# EAGLE board axiom_beta_power_board_v0.34 (EAGLE 7.7.0), part 1 of 3
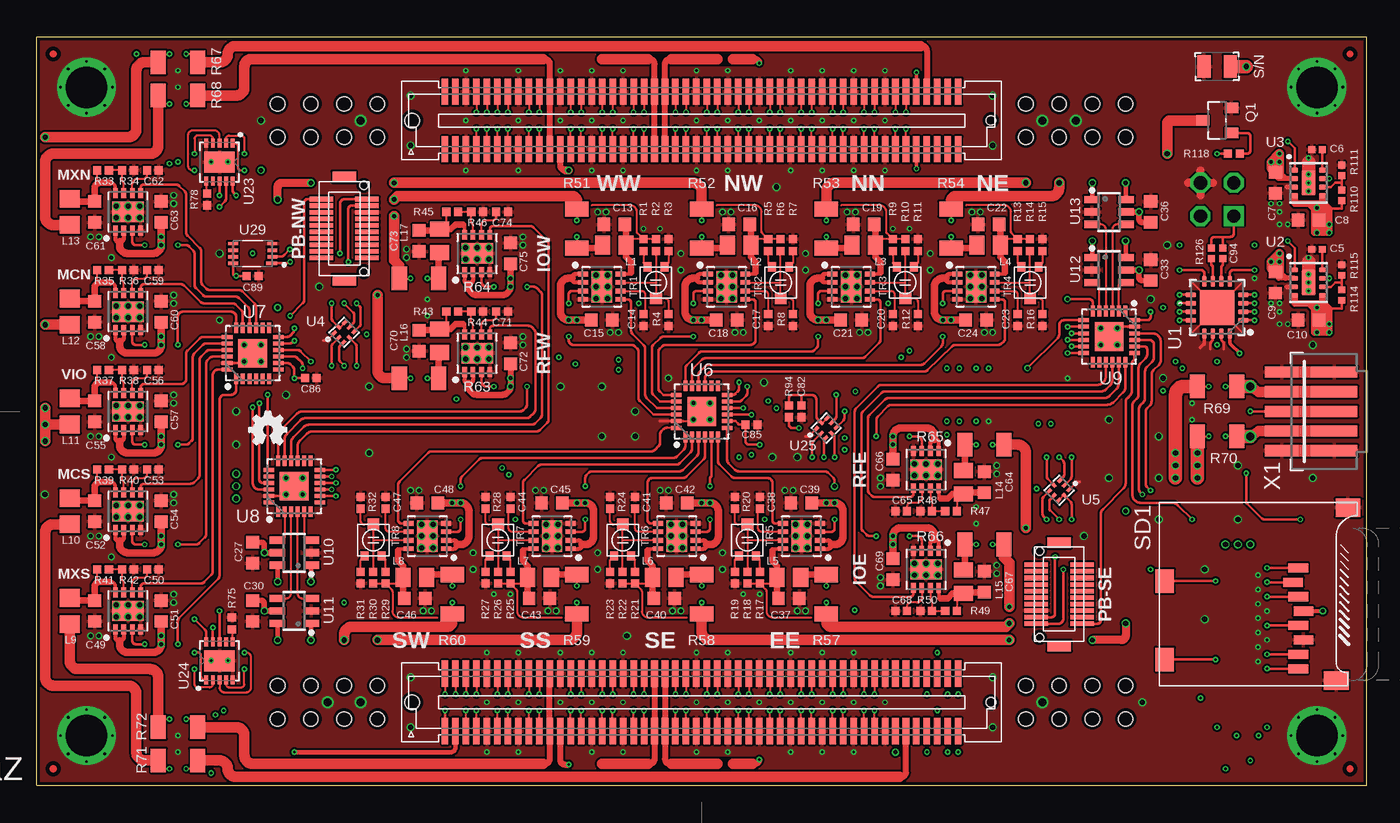
[diagram p0: board, top side]
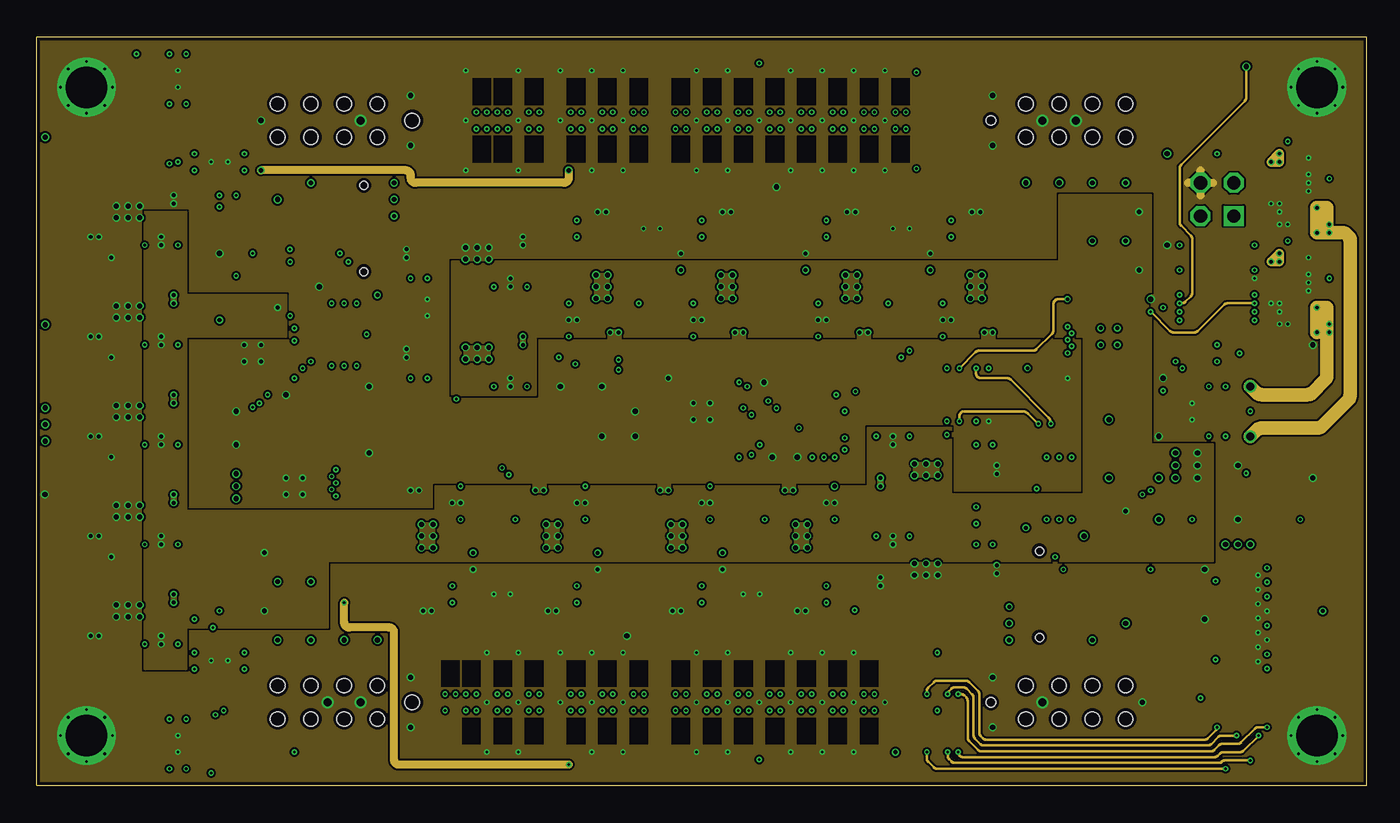
[diagram p1: board, inner layer Route2]
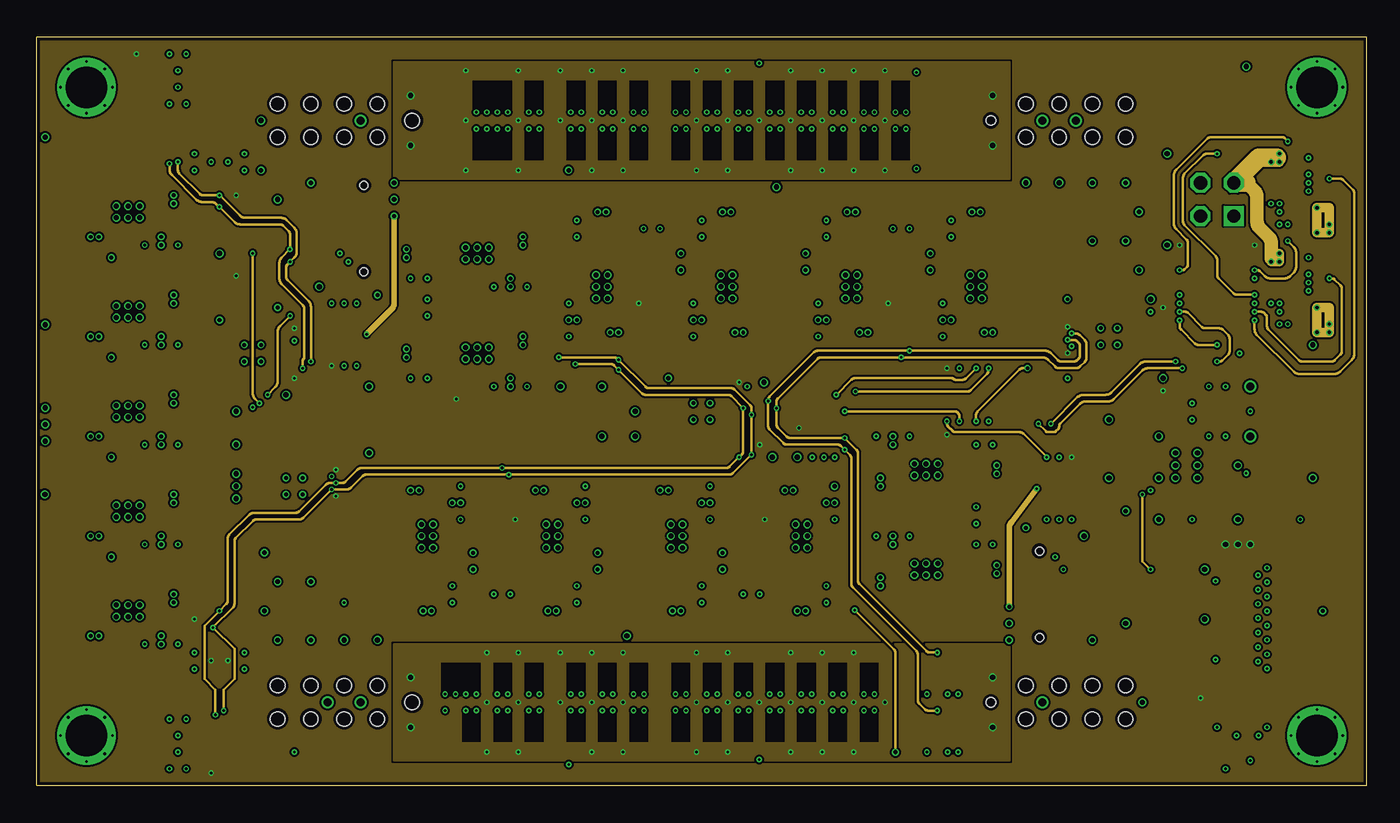
[diagram p2: board, inner layer Route15]
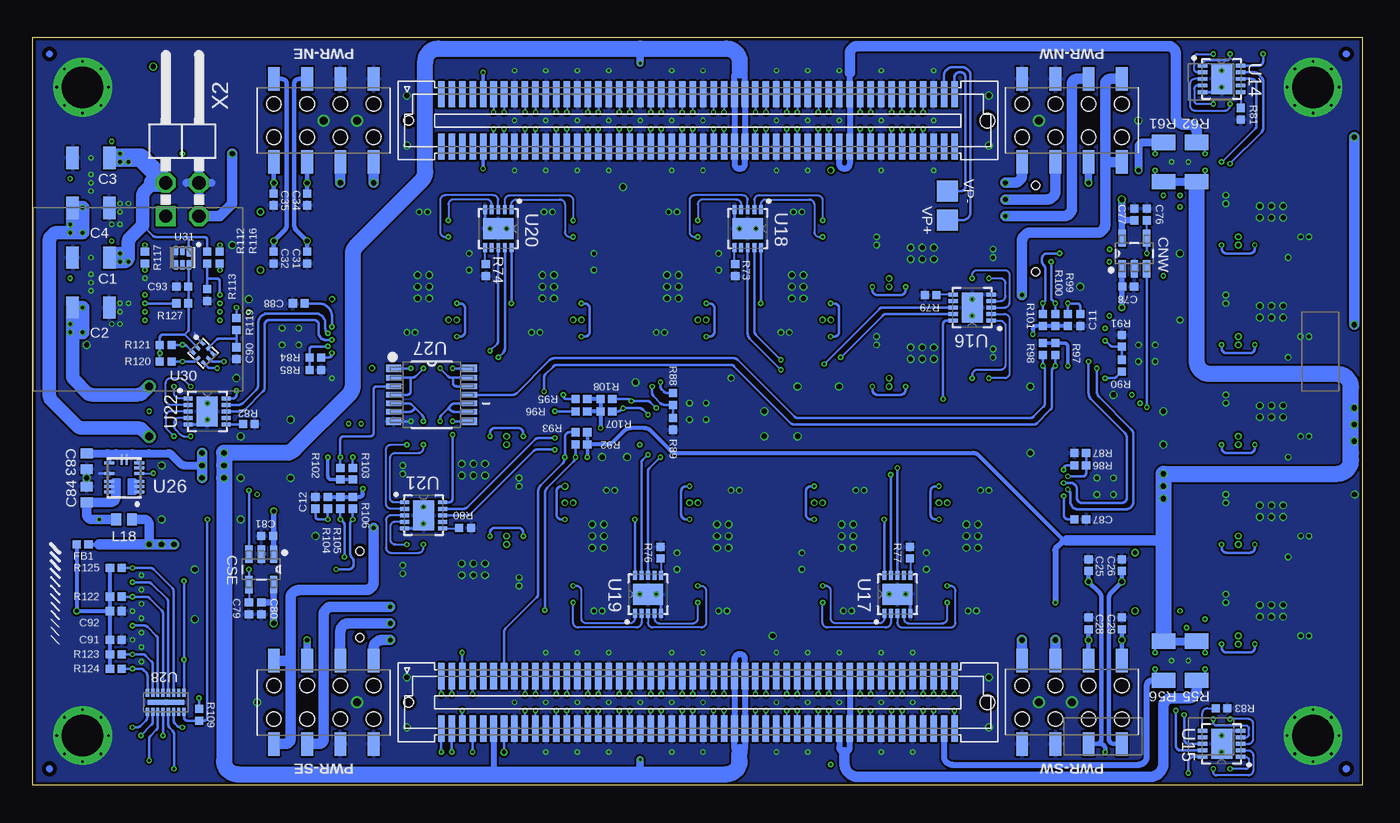
[diagram p3: board, bottom side, seen from below]

Size 101.6 x 57.15 mm. Coordinates in mm from the lower left corner, seen from the top.
Outline: 101.6,57.15 0,57.15 0,0 101.6,0 101.6,57.15
Copper layers (1*2*15*16): Top 0.035559375mm / dielectric 0.17018125mm / Route2 0.01778125mm / dielectric 47mil / Route15 0.01778125mm / dielectric 0.17018125mm / Bottom 0.035559375mm
Design rules "OSHPark-4layer-tuned *": minimum track width 5mil, minimum drill 8mil, track to track 6mil, track to pad 5mil, pad to pad 5mil, via to via 5mil, smd to smd 0mil, copper to edge 10mil, drill to drill 6mil, minimum pad ring 4mil, minimum via ring 4mil, stop-mask expansion 2mil, vias tented up to drill 25mil, thermal gap 6mil
Net classes: 1 LVDS: width 0.152 mm, drill 0.203 mm, clearance 0.152 mm
tKeepout: area 1.3,50.8 to 6.3,55.9; area 1.3,1.3 to 6.3,6.3; area 95.2,1.3 to 100.3,6.3; area 95.2,50.8 to 100.3,55.9
bKeepout: area 95.2,50.8 to 100.3,55.9; area 95.2,1.3 to 100.3,6.3; area 1.3,1.3 to 6.3,6.3; area 1.3,50.8 to 6.3,55.9
tRestrict: area 99.8,55.3 to 100.9,56.4; area 99.8,0.7 to 100.9,1.8; area 0.7,55.3 to 1.8,56.4; area 0.7,0.7 to 1.8,1.8
bRestrict: area 99.8,55.3 to 100.9,56.4; area 99.8,0.7 to 100.9,1.8; area 0.7,55.3 to 1.8,56.4; area 0.7,0.7 to 1.8,1.8

## Footprints (pad centres in the part's own frame; a part is rotated, then mirrored left to right if it is on the bottom)
µZ-SOCKET-NOHOLES-R = smd 0.5 x 2: 1 19.6,24.425; 2 19.6,20.027; 3 18.8,24.425; 4 18.8,20.027; 5 18,24.425; 6 18,20.027; 7 17.2,24.425; 8 17.2,20.027; 9 16.4,24.425; 10 16.4,20.027; 11 15.6,24.425; 12 15.6,20.027; 13 14.8,24.425; 14 14.8,20.027; 15 14,24.425; 16 14,20.027; 17 13.2,24.425; 18 13.2,20.027; 19 12.4,24.425; 20 12.4,20.027; 21 11.6,24.425; 22 11.6,20.027; 23 10.8,24.425; 24 10.8,20.027; 25 10,24.425; 26 10,20.027; 27 9.2,24.425; 28 9.2,20.027; 29 8.4,24.425; 30 8.4,20.027; 31 7.6,24.425; 32 7.6,20.027; 33 6.8,24.425; 34 6.8,20.027; 35 6,24.425; 36 6,20.027; 37 5.2,24.425; 38 5.2,20.027; 39 4.4,24.425; 40 4.4,20.027; 41 3.6,24.425; 42 3.6,20.027; 43 2.8,24.425; 44 2.8,20.027; 45 2,24.425; 46 2,20.027; 47 1.2,24.425; 48 1.2,20.027; 49 0.4,24.425; 50 0.4,20.027; 51 -0.4,24.425; 52 -0.4,20.027; 53 -1.2,24.425; 54 -1.2,20.027; 55 -2,24.425; 56 -2,20.027; 57 -2.8,24.425; 58 -2.8,20.027; 59 -3.6,24.425; 60 -3.6,20.027; 61 -4.4,24.425; 62 -4.4,20.027; 63 -5.2,24.425; 64 -5.2,20.027; 65 -6,24.425; 66 -6,20.027; 67 -6.8,24.425; 68 -6.8,20.027; 69 -7.6,24.425; 70 -7.6,20.027; 71 -8.4,24.425; 72 -8.4,20.027; 73 -9.2,24.425; 74 -9.2,20.027; 75 -10,24.425; 76 -10,20.027; 77 -10.8,24.425; 78 -10.8,20.027; 79 -11.6,24.425; 80 -11.6,20.027; 81 -12.4,24.425; 82 -12.4,20.027; 83 -13.2,24.425; 84 -13.2,20.027; 85 -14,24.425; 86 -14,20.027; 87 -14.8,24.425; 88 -14.8,20.027; 89 -15.6,24.425; 90 -15.6,20.027; 91 -16.4,24.425; 92 -16.4,20.027; 93 -17.2,24.425; 94 -17.2,20.027; 95 -18,24.425; 96 -18,20.027; 97 -18.8,24.425; 98 -18.8,20.027; 99 -19.6,24.425; 100 -19.6,20.027; 101 19.6,-20.025; 102 19.6,-24.425; 103 18.8,-20.027; 104 18.8,-24.425; 105 18,-20.027; 106 18,-24.425; 107 17.2,-20.027; 108 17.2,-24.425; 109 16.4,-20.027; 110 16.4,-24.425; 111 15.6,-20.027; 112 15.6,-24.425; 113 14.8,-20.027; 114 14.8,-24.425; 115 14,-20.027; 116 14,-24.425; 117 13.2,-20.027; 118 13.2,-24.425; 119 12.4,-20.027; 120 12.4,-24.425; 121 11.6,-20.027; 122 11.6,-24.425; 123 10.8,-20.027; 124 10.8,-24.425; 125 10,-20.027; 126 10,-24.425; 127 9.2,-20.027; 128 9.2,-24.425; 129 8.4,-20.027; 130 8.4,-24.425; 131 7.6,-20.027; 132 7.6,-24.425; 133 6.8,-20.027; 134 6.8,-24.425; 135 6,-20.027; 136 6,-24.425; 137 5.2,-20.027; 138 5.2,-24.425; 139 4.4,-20.027; 140 4.4,-24.425; 141 3.6,-20.027; 142 3.6,-24.425; 143 2.8,-20.027; 144 2.8,-24.425; 145 2,-20.027; 146 2,-24.425; 147 1.2,-20.027; 148 1.2,-24.425; 149 0.4,-20.027; 150 0.4,-24.425; 151 -0.4,-20.027; 152 -0.4,-24.425; 153 -1.2,-20.027; 154 -1.2,-24.425; 155 -2,-20.027; 156 -2,-24.425; 157 -2.8,-20.027; 158 -2.8,-24.425; 159 -3.6,-20.027; 160 -3.6,-24.425; 161 -4.4,-20.027; 162 -4.4,-24.425; 163 -5.2,-20.027; 164 -5.2,-24.425; 165 -6,-20.027; 166 -6,-24.425; 167 -6.8,-20.027; 168 -6.8,-24.425; 169 -7.6,-20.027; 170 -7.6,-24.425; 171 -8.4,-20.027; 172 -8.4,-24.425; 173 -9.2,-20.027; 174 -9.2,-24.425; 175 -10,-20.027; 176 -10,-24.425; 177 -10.8,-20.027; 178 -10.8,-24.425; 179 -11.6,-20.027; 180 -11.6,-24.425; 181 -12.4,-20.027; 182 -12.4,-24.425; 183 -13.2,-20.027; 184 -13.2,-24.425; 185 -14,-20.027; 186 -14,-24.425; 187 -14.8,-20.027; 188 -14.8,-24.425; 189 -15.6,-20.027; 190 -15.6,-24.425; 191 -16.4,-20.027; 192 -16.4,-24.425; 193 -17.2,-20.027; 194 -17.2,-24.425; 195 -18,-20.027; 196 -18,-24.425; 197 -18.8,-20.027; 198 -18.8,-24.425; 199 -19.6,-20.027; 200 -19.6,-24.425 | hole 0.725: 22.1,22.225; 22.1,-22.225 | hole 1.125: -22.1,22.225; -22.1,-22.225
1206-C = smd 0.95 x 1.7: 1 -1.4,0; 2 1.4,0
0402-C = smd 0.52 x 0.52: 1 -0.4,0; 2 0.4,0
0603-B = smd 0.95 x 1: 1 -0.8,0; 2 0.8,0
0402-B = smd 0.62 x 0.62: 1 -0.45,0; 2 0.45,0
0603-C = smd 0.75 x 0.9: 1 -0.6,0; 2 0.6,0
SOT95P280X145-5N = smd 1.321 x 0.559: 1 -1.168,0.94; 2 -1.168,0; 3 -1.168,-0.94; 4 1.168,-0.94; 5 1.168,0.94
DFN65P300X300X100-9N = smd 0.762 x 0.356: 1 -1.422,0.965; 2 -1.422,0.33; 3 -1.422,-0.33; 4 -1.422,-0.965; 5 1.422,-0.965; 6 1.422,-0.33; 7 1.422,0.33; 8 1.422,0.965 | smd 1.549 x 2.413: 9 0,0
0805-B = smd 1.15 x 1.45: 1 -0.9,0; 2 0.9,0
0805-A = smd 1.35 x 1.55: 1 -1,0; 2 1,0
DF12(XX)-20DP-0.5V = smd 1.8 x 0.35: 1 -1.75,2.25; 2 1.75,2.25; 3 -1.75,1.75; 4 1.75,1.75; 5 -1.75,1.25; 6 1.75,1.25; 7 -1.75,0.75; 8 1.75,0.75; 9 -1.75,0.25; 10 1.75,0.25; 11 -1.75,-0.25; 12 1.75,-0.25; 13 -1.75,-0.75; 14 1.75,-0.75; 15 -1.75,-1.25; 16 1.75,-1.25; 17 -1.75,-1.75; 18 1.75,-1.75; 19 -1.75,-2.25; 20 1.75,-2.25 | smd 1.8 x 0.8: M1 0,3.95; M2 0,-3.95 | hole 0.625: 1.5,-3.3; 1.5,3.3
R2X04 = smd 0.9 x 1.8: 1 -3.81,3.175; 2 -3.81,-3.175; 3 -1.27,3.175; 4 -1.27,-3.175; 5 1.27,3.175; 6 1.27,-3.175; 7 3.81,3.175; 8 3.81,-3.175 | hole 1.1: -3.81,1.27; -1.27,1.27; -1.27,-1.27; -3.81,-1.27; 1.27,1.27; 1.27,-1.27; 3.81,1.27; 3.81,-1.27
SOT23 = smd 0.8 x 1: 1 -0.95,-1.1; 2 0.95,-1.1; 3 0,1.1
1206-B = smd 1.15 x 1.8: 1 -1.5,0; 2 1.5,0
3X2MM = smd 1 x 1.75: 1 -1,0; 2 1,0
TF-MICRO-SD_PP2 = smd 0.7 x 1.5: 1 9,-10.64; 2 7.9,-10.24; 3 6.8,-10.64; 4 5.7,-11.04; 5 4.6,-10.64; 6 3.5,-11.04; 7 2.4,-10.64; 8 1.3,-10.64 | smd 1.8 x 1.4: CD1 2,-0.44; CD2 8,-0.44 | smd 1.4 x 1.9: MT1 0.4,-13.54; MT2 13.6,-14.44
TRIM-PVZ2A = smd 0.6 x 0.7: 1 -0.65,-1.2; 3 0.65,-1.2 | smd 0.9 x 0.9: 2 0,1.2
UQFN65P400X400X100-17N = smd 0.8 x 0.35: 1 -2,0.975; 2 -2,0.325; 3 -2,-0.325; 4 -2,-0.975; 9 2,-0.975; 10 2,-0.325; 11 2,0.325; 12 2,0.975 | smd 0.35 x 0.8: 5 -0.975,-2; 6 -0.325,-2; 7 0.325,-2; 8 0.975,-2; 13 0.975,2; 14 0.325,2; 15 -0.325,2; 16 -0.975,2 | smd 2.7 x 2.7: EP 0,0
SIL0008D-GM = smd 0.5 x 0.4: 1 -1.05,0.975; 2 -1.05,0.325; 3 -1.05,-0.325; 4 -1.05,-0.975; 5 1.05,-0.975; 6 1.05,-0.325; 7 1.05,0.325; 8 1.05,0.975 | smd 1.1 x 1.9: EPAD 0,0
PCA9570GMH = smd 0.45 x 0.25: 1 -0.6,0.5; 2 -0.6,0; 3 -0.6,-0.5; 5 0.6,-0.5; 6 0.6,0; 7 0.6,0.5 | smd 0.25 x 0.45: 4 0,-0.6; 8 0,0.6
QFN50P400X400X80-25N = smd 0.813 x 0.305: 1 -1.95,1.25; 2 -1.95,0.75; 3 -1.95,0.25; 4 -1.95,-0.25; 5 -1.95,-0.75; 6 -1.95,-1.25; 13 1.95,-1.25; 14 1.95,-0.75; 15 1.95,-0.25; 16 1.95,0.25; 17 1.95,0.75; 18 1.95,1.25 | smd 0.305 x 0.813: 7 -1.25,-1.95; 8 -0.75,-1.95; 9 -0.25,-1.95; 10 0.25,-1.95; 11 0.75,-1.95; 12 1.25,-1.95; 19 1.25,1.95; 20 0.75,1.95; 21 0.25,1.95; 22 -0.25,1.95; 23 -0.75,1.95; 24 -1.25,1.95 | smd 2.2 x 2.2: 25 0,0
SOT23-6 = smd 0.55 x 1.2: 1 -0.95,-1.3; 2 0,-1.3; 3 0.95,-1.3; 4 0.95,1.3; 5 0,1.3; 6 -0.95,1.3
DFN3X3_10LEAD = smd 0.7 x 0.3: 1 -1.45,1; 2 -1.45,0.5; 3 -1.45,0; 4 -1.45,-0.5; 5 -1.45,-1; 6 1.45,-1; 7 1.45,-0.5; 8 1.45,0; 9 1.45,0.5; 10 1.45,1 | smd 1.6 x 2.3: EPAD 0,0
MLPQ-13 = smd 0.8 x 0.2: 1 -1.15,1.065; 2 -1.15,0.665; 3 -1.15,0.265; 4 -1.15,-0.355; 5 -1.15,-0.755; 6 -1.15,-1.155; 9 1.15,-1.155; 10 1.15,-0.355; 11 1.15,0.265; 12 1.15,0.665; 13 1.15,1.065 | smd 0.2 x 0.8: 7 -0.2,-1.4; 8 0.2,-1.4
SOP65P640X120-14N = smd 0.6 x 1.15: 1 -2.025,-2.9; 7 2.025,-2.9; 8 2.025,2.9; 14 -2.025,2.9 | smd 0.4 x 1.15: 2 -1.3,-2.9; 3 -0.65,-2.9; 4 0,-2.9; 5 0.65,-2.9; 6 1.3,-2.9; 9 1.3,2.9; 10 0.65,2.9; 11 0,2.9; 12 -0.65,2.9; 13 -1.3,2.9
SON40P135X330X55-17N = smd 0.61 x 0.254: 1 -0.737,1.397; 2 -0.737,0.991; 3 -0.737,0.61; 4 -0.737,0.203; 5 -0.737,-0.203; 6 -0.737,-0.61; 7 -0.737,-0.991; 8 -0.737,-1.397; 9 0.737,-1.397; 10 0.737,-0.991; 11 0.737,-0.61; 12 0.737,-0.203; 13 0.737,0.203; 14 0.737,0.61; 15 0.737,0.991; 16 0.737,1.397 | smd 0.406 x 2.794: 17 0,0
SOT996-2/3 = smd 0.25 x 0.85: 1 -0.75,-1.45 | smd 0.25 x 0.75: 2 -0.25,-1.5; 3 0.25,-1.5; 4 0.75,-1.5; 5 0.75,1.5; 6 0.25,1.5; 7 -0.25,1.5; 8 -0.75,1.5
DFN150X150X50-6N = smd 0.83 x 0.35: 1 -0.49,0.5 | smd 0.73 x 0.35: 2 -0.54,0; 3 -0.54,-0.5; 4 0.54,-0.5; 5 0.54,0; 6 0.54,0.5
TP16SQ = smd 1.6 x 1.6: TP 0,0
PICO-SPOX-5 = smd 0.85 x 2.55: 1 -3,-6.5; 2 -1.5,-6.5; 3 0,-6.5; 4 1.5,-6.5; 5 3,-6.5 | smd 0.85 x 3.55: 1A -3,-2.5; 2A -1.5,-2.5; 3A 0,-2.5; 4A 1.5,-2.5; 5A 3,-2.5
2X02/90 = drill 1.016 square: 1 -1.27,-6.35 | drill 1.016 octagon: 2 -1.27,-3.81; 3 1.27,-6.35; 4 1.27,-3.81
µZ-CONONLY = smd 0.5 x 2: 1 19.6,-24.226; 2 19.6,-20.226; 3 18.8,-24.226; 4 18.8,-20.226; 5 18,-24.226; 6 18,-20.226; 7 17.2,-24.226; 8 17.2,-20.226; 9 16.4,-24.226; 10 16.4,-20.226; 11 15.6,-24.226; 12 15.6,-20.226; 13 14.8,-24.226; 14 14.8,-20.226; 15 14,-24.226; 16 14,-20.226; 17 13.2,-24.226; 18 13.2,-20.226; 19 12.4,-24.226; 20 12.4,-20.226; 21 11.6,-24.226; 22 11.6,-20.226; 23 10.8,-24.226; 24 10.8,-20.226; 25 10,-24.226; 26 10,-20.226; 27 9.2,-24.226; 28 9.2,-20.226; 29 8.4,-24.226; 30 8.4,-20.226; 31 7.6,-24.226; 32 7.6,-20.226; 33 6.8,-24.226; 34 6.8,-20.226; 35 6,-24.226; 36 6,-20.226; 37 5.2,-24.226; 38 5.2,-20.226; 39 4.4,-24.226; 40 4.4,-20.226; 41 3.6,-24.226; 42 3.6,-20.226; 43 2.8,-24.226; 44 2.8,-20.226; 45 2,-24.226; 46 2,-20.226; 47 1.2,-24.226; 48 1.2,-20.226; 49 0.4,-24.226; 50 0.4,-20.226; 51 -0.4,-24.226; 52 -0.4,-20.226; 53 -1.2,-24.226; 54 -1.2,-20.226; 55 -2,-24.226; 56 -2,-20.226; 57 -2.8,-24.226; 58 -2.8,-20.226; 59 -3.6,-24.226; 60 -3.6,-20.226; 61 -4.4,-24.226; 62 -4.4,-20.226; 63 -5.2,-24.226; 64 -5.2,-20.226; 65 -6,-24.226; 66 -6,-20.226; 67 -6.8,-24.226; 68 -6.8,-20.226; 69 -7.6,-24.226; 70 -7.6,-20.226; 71 -8.4,-24.226; 72 -8.4,-20.226; 73 -9.2,-24.226; 74 -9.2,-20.226; 75 -10,-24.226; 76 -10,-20.226; 77 -10.8,-24.226; 78 -10.8,-20.226; 79 -11.6,-24.226; 80 -11.6,-20.226; 81 -12.4,-24.226; 82 -12.4,-20.226; 83 -13.2,-24.226; 84 -13.2,-20.226; 85 -14,-24.226; 86 -14,-20.226; 87 -14.8,-24.226; 88 -14.8,-20.226; 89 -15.6,-24.226; 90 -15.6,-20.226; 91 -16.4,-24.226; 92 -16.4,-20.226; 93 -17.2,-24.226; 94 -17.2,-20.226; 95 -18,-24.226; 96 -18,-20.226; 97 -18.8,-24.226; 98 -18.8,-20.226; 99 -19.6,-24.226; 100 -19.6,-20.226; 101 19.6,20.226; 102 19.6,24.226; 103 18.8,20.226; 104 18.8,24.226; 105 18,20.226; 106 18,24.226; 107 17.2,20.226; 108 17.2,24.226; 109 16.4,20.226; 110 16.4,24.226; 111 15.6,20.226; 112 15.6,24.226; 113 14.8,20.226; 114 14.8,24.226; 115 14,20.226; 116 14,24.226; 117 13.2,20.226; 118 13.2,24.226; 119 12.4,20.226; 120 12.4,24.226; 121 11.6,20.226; 122 11.6,24.226; 123 10.8,20.226; 124 10.8,24.226; 125 10,20.226; 126 10,24.226; 127 9.2,20.226; 128 9.2,24.226; 129 8.4,20.226; 130 8.4,24.226; 131 7.6,20.226; 132 7.6,24.226; 133 6.8,20.226; 134 6.8,24.226; 135 6,20.226; 136 6,24.226; 137 5.2,20.226; 138 5.2,24.226; 139 4.4,20.226; 140 4.4,24.226; 141 3.6,20.226; 142 3.6,24.226; 143 2.8,20.226; 144 2.8,24.226; 145 2,20.226; 146 2,24.226; 147 1.2,20.226; 148 1.2,24.226; 149 0.4,20.226; 150 0.4,24.226; 151 -0.4,20.226; 152 -0.4,24.226; 153 -1.2,20.226; 154 -1.2,24.226; 155 -2,20.226; 156 -2,24.226; 157 -2.8,20.226; 158 -2.8,24.226; 159 -3.6,20.226; 160 -3.6,24.226; 161 -4.4,20.226; 162 -4.4,24.226; 163 -5.2,20.226; 164 -5.2,24.226; 165 -6,20.226; 166 -6,24.226; 167 -6.8,20.226; 168 -6.8,24.226; 169 -7.6,20.226; 170 -7.6,24.226; 171 -8.4,20.226; 172 -8.4,24.226; 173 -9.2,20.226; 174 -9.2,24.226; 175 -10,20.226; 176 -10,24.226; 177 -10.8,20.226; 178 -10.8,24.226; 179 -11.6,20.226; 180 -11.6,24.226; 181 -12.4,20.226; 182 -12.4,24.226; 183 -13.2,20.226; 184 -13.2,24.226; 185 -14,20.226; 186 -14,24.226; 187 -14.8,20.226; 188 -14.8,24.226; 189 -15.6,20.226; 190 -15.6,24.226; 191 -16.4,20.226; 192 -16.4,24.226; 193 -17.2,20.226; 194 -17.2,24.226; 195 -18,20.226; 196 -18,24.226; 197 -18.8,20.226; 198 -18.8,24.226; 199 -19.6,20.226; 200 -19.6,24.226 | hole 1.125: -22.1,-22.225; -22.1,22.225 | hole 0.725: 22.1,-22.225; 22.1,22.225

## Placement (x,y rotation side)
BETA  µZ-FCI-SOCKET-NOHOLES-R  [µZ-SOCKET-NOHOLES-R]  50.8,28.57 0 top
C1  10u  [1206-C]  97.16,40.32 180 bottom
C2  10u  [1206-C]  97.16,36.51 0 bottom
C3  10u  [1206-C]  97.16,47.94 180 bottom
C4  10u  [1206-C]  97.16,44.13 0 bottom
C5  1n  [0402-C]  97.79,40.96 180 top
C6  1n  [0402-C]  97.79,48.58 180 top
C7  10u  [0603-B]  94.61,46.04 270 top
C8  10u  [0603-B]  97.16,43.18 180 top
C9  10u  [0603-B]  94.61,38.42 270 top
C10  10u  [0603-B]  97.16,35.56 180 top
C11  10n  [0402-B]  21.59,35.56 270 bottom
C12  10n  [0402-B]  80.01,21.59 90 bottom
C13  4u7  [0603-B]  44.13,42.86 180 top
C14  DNP  [0402-B]  46.35,35.56 270 top
C15  10u  [0603-B]  43.18,35.56 0 top
C16  4u7  [0603-B]  53.66,42.86 180 top
C17  DNP  [0402-B]  55.88,35.56 270 top
C18  10u  [0603-B]  52.7,35.56 0 top
C19  4u7  [0603-B]  63.18,42.86 180 top
C20  DNP  [0402-B]  65.41,35.56 270 top
C21  10u  [0603-B]  62.23,35.56 0 top
C22  4u7  [0603-B]  72.71,42.86 180 top
C23  DNP  [0402-B]  74.93,35.56 270 top
C24  10u  [0603-B]  71.75,35.56 0 top
C25  1u  [0402-B]  20.95,16.83 90 bottom
C26  1u  [0402-B]  18.41,16.83 90 bottom
C27  4u7  [0603-B]  16.51,17.78 270 top
C28  1u  [0402-B]  20.95,12.38 90 bottom
C29  1u  [0402-B]  18.41,12.38 90 bottom
C30  4u7  [0603-B]  16.51,13.33 270 top
C31  1u  [0402-B]  80.64,40.32 270 bottom
C32  1u  [0402-B]  83.19,40.32 270 bottom
C33  4u7  [0603-B]  85.09,39.37 90 top
C34  1u  [0402-B]  80.64,44.77 270 bottom
C35  1u  [0402-B]  83.19,44.77 270 bottom
C36  4u7  [0603-B]  85.09,43.81 90 top
C37  4u7  [0603-B]  57.47,14.29 0 top
C38  DNP  [0402-B]  55.24,21.59 90 top
C39  10u  [0603-B]  58.42,21.59 180 top
C40  4u7  [0603-B]  47.94,14.29 0 top
C41  DNP  [0402-B]  45.72,21.59 90 top
C42  10u  [0603-B]  48.89,21.59 180 top
C43  4u7  [0603-B]  38.42,14.29 0 top
C44  DNP  [0402-B]  36.19,21.59 90 top
C45  10u  [0603-B]  39.37,21.59 180 top
C46  4u7  [0603-B]  28.89,14.29 0 top
C47  DNP  [0402-B]  26.67,21.59 90 top
C48  10u  [0603-B]  29.84,21.59 180 top
C49  4u7  [0603-B]  4.45,13.33 270 top
C50  DNP  [0402-B]  8.89,16.51 0 top
C51  10u  [0603-B]  9.52,13.33 90 top
C52  4u7  [0603-B]  4.45,20.95 270 top
C53  DNP  [0402-B]  8.89,24.13 0 top
C54  10u  [0603-B]  9.52,20.95 90 top
C55  4u7  [0603-B]  4.45,28.57 270 top
C56  DNP  [0402-B]  8.89,31.75 0 top
C57  10u  [0603-B]  9.52,28.57 90 top
C58  4u7  [0603-B]  4.45,36.2 270 top
C59  DNP  [0402-B]  8.89,39.37 0 top
C60  10u  [0603-B]  9.52,36.2 90 top
C61  4u7  [0603-B]  4.45,43.81 270 top
C62  DNP  [0402-B]  8.89,46.99 0 top
C63  10u  [0603-B]  9.52,43.81 90 top
C64  4u7  [0603-B]  72.39,23.18 90 top
C65  DNP  [0402-B]  66.04,20.95 180 top
C66  10u  [0603-B]  65.41,24.13 270 top
C67  4u7  [0603-B]  72.39,15.56 90 top
C68  DNP  [0402-B]  66.04,13.33 180 top
C69  10u  [0603-B]  65.41,16.51 270 top
C70  4u7  [0603-B]  29.21,33.97 270 top
C71  DNP  [0402-B]  35.56,36.2 0 top
C72  10u  [0603-B]  36.19,33.02 90 top
C73  4u7  [0603-B]  29.21,41.59 270 top
C74  DNP  [0402-B]  35.56,43.81 0 top
C75  10u  [0603-B]  36.19,40.64 90 top
C76  10n  [0402-B]  16.51,43.62 90 bottom
C77  1u  [0402-B]  17.46,43.62 90 bottom
C78  1u  [0402-B]  17.93,38.1 0 bottom
C79  10n  [0402-B]  85.09,13.53 270 bottom
C80  1u  [0402-B]  84.14,13.53 270 bottom
C81  1u  [0402-B]  83.69,19.05 180 bottom
C82  10n  [0402-B]  58.42,28.57 270 top
C83  10u  [0603-C]  97.47,24.77 270 bottom
C84  10u  [0603-C]  97.47,22.23 90 bottom
C85  100n  [0402-B]  54.61,27.56 0 top
C86  100n  [0402-B]  20.95,31.11 0 top
C87  100n  [0402-B]  21.59,20.32 0 bottom
C88  100n  [0402-B]  81.28,36.83 180 bottom
C89  100n  [0402-B]  16.51,38.93 0 top
C90  10n  [0402-B]  86.04,33.02 270 bottom
C91  1u  [0402-B]  95.25,11.12 0 bottom
C92  100n  [0402-B]  95.25,13.32 0 bottom
C93  4u7  [0402-B]  90.17,38.1 180 bottom
C94  100n  [0402-C]  90.61,40.64 270 top
CNW  SPX3819M5-L  [SOT95P280X145-5N]  17.46,40.64 90 bottom
CSE  SPX3819M5-L  [SOT95P280X145-5N]  84.14,16.51 270 bottom
EE  MCP1727-ADJE/MF  [DFN65P300X300X100-9N]  58.42,19.05 180 top
FB1  [0402-B]  97.79,18.41 180 bottom
IOE  MCP1727-ADJE/MF  [DFN65P300X300X100-9N]  67.94,16.51 270 top
IOW  MCP1727-ADJE/MF  [DFN65P300X300X100-9N]  33.66,40.64 90 top
L1  [0805-B]  44.13,41.27 180 top
L2  [0805-B]  53.66,41.27 180 top
L3  [0805-B]  63.18,41.27 180 top
L4  [0805-B]  72.71,41.27 180 top
L5  [0805-B]  57.47,15.88 0 top
L6  [0805-B]  47.94,15.88 0 top
L7  [0805-B]  38.42,15.88 0 top
L8  [0805-B]  28.89,15.88 0 top
L9  [0805-A]  2.54,13.33 270 top
L10  [0805-A]  2.54,20.95 270 top
L11  [0805-A]  2.54,28.57 270 top
L12  [0805-A]  2.54,36.2 270 top
L13  [0805-A]  2.54,43.81 270 top
L14  [0805-B]  70.8,23.18 90 top
L15  [0805-B]  70.8,15.56 90 top
L16  [0805-B]  30.8,33.97 270 top
L17  [0805-B]  30.8,41.59 270 top
L18  [0603-C]  94.61,20.32 0 bottom
LOGO1  OSHW_LOGO_FILLX0100-NT  [OSHW_FILLX100_NOTEXT]  16.26,26.04 0 top
MCN  MCP1727-ADJE/MF  [DFN65P300X300X100-9N]  6.98,36.2 90 top
MCS  MCP1727-ADJE/MF  [DFN65P300X300X100-9N]  6.98,20.95 90 top
MXN  MCP1727-ADJE/MF  [DFN65P300X300X100-9N]  6.98,43.81 90 top
MXS  MCP1727-ADJE/MF  [DFN65P300X300X100-9N]  6.98,13.33 90 top
NE  MCP1727-ADJE/MF  [DFN65P300X300X100-9N]  71.75,38.1 0 top
NN  MCP1727-ADJE/MF  [DFN65P300X300X100-9N]  62.23,38.1 0 top
NW  MCP1727-ADJE/MF  [DFN65P300X300X100-9N]  52.7,38.1 0 top
PB-NW  DF12(XX)-20DP-0.5V  [DF12(XX)-20DP-0.5V]  23.49,42.55 0 top
PB-SE  DF12(XX)-20DP-0.5V  [DF12(XX)-20DP-0.5V]  78.1,14.6 180 top
PWR-NE  PINRC-2X04  [R2X04]  79.38,50.8 180 bottom
PWR-NW  PINRC-2X04  [R2X04]  22.22,50.8 0 bottom
PWR-SE  PINRC-2X04  [R2X04]  79.38,6.35 180 bottom
PWR-SW  PINRC-2X04  [R2X04]  22.22,6.35 0 bottom
Q1  NX3008NBK  [SOT23]  90.17,50.8 90 top
R1  RA  [0402-B]  46.35,41.27 90 top
R2  RB  [0402-B]  47.31,41.27 270 top
R3  RC  [0402-B]  48.26,41.27 90 top
R4  RD  [0402-B]  48.26,35.56 270 top
R5  RA  [0402-B]  55.88,41.27 90 top
R6  RB  [0402-B]  56.83,41.27 270 top
R7  RC  [0402-B]  57.78,41.27 90 top
R8  RD  [0402-B]  57.78,35.56 270 top
R9  RA  [0402-B]  65.41,41.27 90 top
R10  RB  [0402-B]  66.36,41.27 270 top
R11  RC  [0402-B]  67.31,41.27 90 top
R12  RD  [0402-B]  67.31,35.56 270 top
R13  RA  [0402-B]  74.93,41.27 90 top
R14  RB  [0402-B]  75.88,41.27 270 top
R15  RC  [0402-B]  76.83,41.27 90 top
R16  RD  [0402-B]  76.83,35.56 270 top
R17  RA  [0402-B]  55.24,15.88 270 top
R18  RB  [0402-B]  54.29,15.88 90 top
R19  RC  [0402-B]  53.34,15.88 270 top
R20  RD  [0402-B]  53.34,21.59 90 top
R21  RA  [0402-B]  45.72,15.88 270 top
R22  RB  [0402-B]  44.77,15.88 90 top
R23  RC  [0402-B]  43.81,15.88 270 top
R24  RD  [0402-B]  43.81,21.59 90 top
R25  RA  [0402-B]  36.19,15.88 270 top
R26  RB  [0402-B]  35.24,15.88 90 top
R27  RC  [0402-B]  34.29,15.88 270 top
R28  RD  [0402-B]  34.29,21.59 90 top
R29  RA  [0402-B]  26.67,15.88 270 top
R30  RB  [0402-B]  25.72,15.88 90 top
R31  RC  [0402-B]  24.76,15.88 270 top
R32  RD  [0402-B]  24.76,21.59 90 top
R33  RD  [0402-B]  5.08,46.99 0 top
R34  RC  [0402-B]  6.98,46.99 0 top
R35  RD  [0402-B]  5.08,39.37 0 top
R36  RC  [0402-B]  6.98,39.37 0 top
R37  102k  [0402-B]  5.08,31.75 0 top
R38  20k  [0402-B]  6.98,31.75 0 top
R39  RD  [0402-B]  5.08,24.13 0 top
R40  RC  [0402-B]  6.98,24.13 0 top
R41  RD  [0402-B]  5.08,16.51 0 top
R42  RC  [0402-B]  6.98,16.51 0 top
R43  RD  [0402-B]  31.75,36.2 0 top
R44  RC  [0402-B]  33.66,36.2 0 top
R45  RD  [0402-B]  31.75,43.81 0 top
R46  RC  [0402-B]  33.66,43.81 0 top
R47  RD  [0402-B]  69.85,20.95 180 top
R48  RC  [0402-B]  67.94,20.95 180 top
R49  RD  [0402-B]  69.85,13.33 180 top
R50  RC  [0402-B]  67.94,13.33 180 top
R51  [1206-B]  41.27,42.55 90 top
R52  [1206-B]  50.8,42.55 90 top
R53  [1206-B]  60.32,42.55 90 top
R54  [1206-B]  69.85,42.55 90 top
R55  [1206-B]  12.7,9.52 270 bottom
R56  [1206-B]  15.24,9.52 270 bottom
R57  [1206-B]  60.32,14.6 270 top
R58  [1206-B]  50.8,14.6 270 top
R59  [1206-B]  41.27,14.6 270 top
R60  [1206-B]  31.75,14.6 270 top
R61  [1206-B]  15.24,47.62 90 bottom
R62  [1206-B]  12.7,47.62 90 bottom
R63  [1206-B]  29.21,31.11 180 top
R64  [1206-B]  29.21,38.73 180 top
R65  [1206-B]  72.39,26.04 0 top
R66  [1206-B]  72.39,18.41 0 top
R67  [1206-B]  10.79,55.25 0 top
R68  [1206-B]  10.79,52.7 0 top
R69  [1206-B]  90.17,30.48 180 top
R70  [1206-B]  90.17,26.67 180 top
R71  [1206-B]  10.79,1.9 0 top
R72  [1206-B]  10.79,4.45 0 top
R73  750R  [0402-B]  47.94,39.37 270 bottom
R74  1k27  [0402-B]  66.99,39.37 270 bottom
R75  430R  [0402-B]  14.92,12.38 90 top
R76  0R  [0402-B]  53.66,17.78 90 bottom
R77  100R  [0402-B]  34.61,17.78 90 bottom
R78  560R  [0402-B]  13.02,44.77 270 top
R79  5k6  [0402-B]  33.02,37.47 180 bottom
R80  9k1  [0402-B]  68.58,19.68 0 bottom
R81  2k0  [0402-B]  9.33,51.31 270 bottom
R82  1k6  [0402-B]  85.09,27.62 0 bottom
R83  2k7  [0402-B]  10.79,5.91 0 bottom
R84  22k  [0402-B]  80.01,32.7 180 bottom
R85  10k  [0402-B]  80.01,31.75 0 bottom
R86  13k  [0402-B]  21.59,24.45 0 bottom
R87  10k  [0402-B]  21.59,25.4 180 bottom
R88  13k  [0402-B]  52.7,29.53 270 bottom
R89  3k  [0402-B]  52.7,27.62 270 bottom
R90  15k  [0402-B]  18.41,32.07 90 bottom
R91  1k  [0402-B]  18.41,33.97 90 bottom
R92  4k7  [0402-B]  59.69,26.04 180 bottom
R93  4k7  [0402-B]  59.69,26.99 180 bottom
R94  200k  [0402-B]  57.47,28.57 90 top
R95  4k7  [0402-B]  59.69,29.53 180 bottom
R96  4k7  [0402-B]  59.69,28.57 180 bottom
R97  4k7  [0402-B]  23.49,33.34 270 bottom
R98  4k7  [0402-B]  24.45,33.34 270 bottom
R99  200k  [0402-B]  22.54,35.56 90 bottom
R100  4k7  [0402-B]  23.49,35.56 90 bottom
R101  4k7  [0402-B]  24.45,35.56 90 bottom
R102  4k7  [0402-B]  78.1,23.81 90 bottom
R103  4k7  [0402-B]  77.15,23.81 90 bottom
R104  200k  [0402-B]  79.06,21.59 270 bottom
R105  4k7  [0402-B]  78.1,21.59 270 bottom
R106  4k7  [0402-B]  77.15,21.59 270 bottom
R107  4k7  [0402-B]  57.78,28.57 0 bottom
R108  4k7  [0402-B]  57.78,29.53 0 bottom
R109  10k  [0402-B]  88.9,5.4 270 bottom
R110  523k  [0402-C]  99.69,45.09 90 top
R111  100k  [0402-C]  99.69,46.99 90 top
R112  180k  [0402-B]  88.27,40.32 270 bottom
R113  20k  [0402-B]  88.27,37.47 270 bottom
R114  536k  [0402-C]  99.69,37.47 90 top
R115  100k  [0402-C]  99.69,39.37 90 top
R116  100k  [0402-B]  87.31,40.32 270 bottom
R117  100k  [0402-B]  93.03,40.32 270 bottom
R118  100k  [0402-B]  91.44,48.26 180 top
R119  200k  [0402-B]  86.04,35.24 270 bottom
R120  4k7  [0402-B]  91.44,32.38 0 bottom
R121  4k7  [0402-B]  91.44,33.66 0 bottom
R122  50k  [0402-B]  95.25,14.42 0 bottom
R123  50k  [0402-B]  95.25,10.02 0 bottom
R124  50k  [0402-B]  95.25,8.92 0 bottom
R125  50k  [0402-B]  95.25,16.62 0 bottom
R126  100k  [0402-C]  89.73,40.64 90 top
R127  10k  [0402-B]  90.17,36.83 180 bottom
RFE  MCP1727-ADJE/MF  [DFN65P300X300X100-9N]  67.94,24.13 270 top
RFW  MCP1727-ADJE/MF  [DFN65P300X300X100-9N]  33.66,33.02 90 top
S/N  91658  [3X2MM]  90.17,54.93 0 top
SD1  MICRO-SD-2CD  [TF-MICRO-SD_PP2]  85.72,7.62 90 top
SE  MCP1727-ADJE/MF  [DFN65P300X300X100-9N]  48.89,19.05 180 top
SS  MCP1727-ADJE/MF  [DFN65P300X300X100-9N]  39.37,19.05 180 top
SW  MCP1727-ADJE/MF  [DFN65P300X300X100-9N]  29.84,19.05 180 top
TR1  PVZ2A  [TRIM-PVZ2A]  47.31,38.42 180 top
TR2  PVZ2A  [TRIM-PVZ2A]  56.83,38.42 180 top
TR3  PVZ2A  [TRIM-PVZ2A]  66.36,38.42 180 top
TR4  PVZ2A  [TRIM-PVZ2A]  75.88,38.42 180 top
TR5  PVZ2A  [TRIM-PVZ2A]  54.29,18.73 0 top
TR6  PVZ2A  [TRIM-PVZ2A]  44.77,18.73 0 top
TR7  PVZ2A  [TRIM-PVZ2A]  35.24,18.73 0 top
TR8  PVZ2A  [TRIM-PVZ2A]  25.72,18.73 0 top
U1  PIC16F15325-JQ  [UQFN65P400X400X100-17N]  90.17,36.51 180 top
U2  TPS82130SIL-GM  [SIL0008D-GM]  97.16,38.42 0 top
U3  TPS82130SIL-GM  [SIL0008D-GM]  97.16,46.04 0 top
U4  PCA9306GM  [PCA9570GMH]  23.49,34.61 45 top
U5  PCA9306GM  [PCA9570GMH]  78.1,22.54 225 top
U6  MCP23018-E/MJ  [QFN50P400X400X80-25N]  50.8,28.57 90 top
U7  MCP23018-E/MJ  [QFN50P400X400X80-25N]  16.51,33.02 90 top
U8  MCP23018-E/MJ  [QFN50P400X400X80-25N]  19.68,22.86 90 top
U9  MCP23018-E/MJ  [QFN50P400X400X80-25N]  81.91,34.29 270 top
U10  AP7312-3333W6-7  [SOT23-6]  19.68,17.78 90 top
U11  AP7312-3333W6-7  [SOT23-6]  19.68,13.33 90 top
U12  AP7312-3333W6-7  [SOT23-6]  81.91,39.37 270 top
U13  AP7312-3333W6-7  [SOT23-6]  81.91,43.81 270 top
U14  PAC1720  [DFN3X3_10LEAD]  10.79,53.97 0 bottom
U15  PAC1720  [DFN3X3_10LEAD]  10.79,3.18 180 bottom
U16  PAC1720  [DFN3X3_10LEAD]  29.84,36.51 180 bottom
U17  PAC1720  [DFN3X3_10LEAD]  35.56,14.6 90 bottom
U18  PAC1720  [DFN3X3_10LEAD]  46.99,42.55 270 bottom
U19  PAC1720  [DFN3X3_10LEAD]  54.61,14.6 90 bottom
U20  PAC1720  [DFN3X3_10LEAD]  66.04,42.55 270 bottom
U21  PAC1720  [DFN3X3_10LEAD]  71.75,20.64 0 bottom
U22  PAC1720  [DFN3X3_10LEAD]  88.27,28.57 0 bottom
U23  PAC1720  [DFN3X3_10LEAD]  13.97,47.62 270 top
U24  PAC1720  [DFN3X3_10LEAD]  13.97,9.52 90 top
U25  PCA9306GM  [PCA9570GMH]  60.32,27.3 45 top
U26  SC202A  [MLPQ-13]  94.61,23.49 180 bottom
U27  TS3A4751  [SOP65P640X120-14N]  71.12,29.84 270 bottom
U28  IP4251CZ16-8-TTL  [SON40P135X330X55-17N]  91.44,6.35 270 bottom
U29  LM75BGD  [SOT996-2/3]  16.51,40.64 90 top
U30  PCA9306GM  [PCA9570GMH]  88.58,33.02 315 bottom
U31  NCP715  [DFN150X150X50-6N]  90.17,40.32 270 bottom
VIO  MCP1727-ADJE/MF  [DFN65P300X300X100-9N]  6.98,28.57 90 top
VP+  TPTP16SQ  [TP16SQ]  31.75,43.18 180 bottom
VP-  TPTP16SQ  [TP16SQ]  31.75,45.4 180 bottom
WW  MCP1727-ADJE/MF  [DFN65P300X300X100-9N]  43.18,38.1 0 top
X1  PICO-SPOX-5  [PICO-SPOX-5]  101.6,28.57 270 top
X2  [2X02/90]  90.17,49.85 0 bottom
ZED  µZ-FCI-CONONLY  [µZ-CONONLY]  50.8,28.57 180 bottom

## Library data of the parts
BETA ZED = microzed
C1-C69 C73-C94 FB1 L1-L18 R1-R127 = generic-rcl
C70 = generic-rcl; CAPACITANCE: >=1u, <=22u
C71 = generic-rcl; CAPACITANCE: <=100n
C72 = generic-rcl; CAPACITANCE: >=1u, >=C70
CNW CSE = spx3819; MPN: SPX3819M5-L; OC_FARNELL: 1831948; OC_NEWARK: 23R9689; PACKAGE: SOT-23-5; SUPPLIER: EXAR
EE IOE IOW MCN MCS MXN MXS NE NN NW RFE RFW SE SS SW VIO WW = mcp1727; MPN: MCP1727-ADJE/MF; OC_FARNELL: 1851979; OC_NEWARK: 74K5374; PACKAGE: DFN-8; SUPPLIER: Microchip
LOGO1 = ohw-logo
PB-NW PB-SE = df12
PWR-NE PWR-NW PWR-SE PWR-SW = pincon
Q1 = transistor
S/N = serialnumber
SD1 = micro-sd
TR1-TR8 = paul
U1 = pic16f15386
U2 U3 = TPS82130
U4 U5 U25 U30 = lvltrans
U6-U9 = microchip-exp
U10-U13 U31 = ldo
U14-U24 = pac1720
U26 = SC202A
U27 = ts3a4751
U28 = emifil; MPN: IP4251CZ16-8-TTL; OC_FARNELL: 1972684; OC_NEWARK: 58T9585; PACKAGE: SON-16; SUPPLIER: NXP
U29 = lm75
VP+ VP- = testpad
X1 = pico-spox
X2 = pinhead-2

## Nets
!X_MCLR: R127.2 U1.3 U9.24
A_!RST: PB-NW.1 U8.19
A_BUS_EN [LVDS]: U9.6 U27.12 U27.13
A_SCL: PB-NW.2 R101.2 U4.5
A_SCL': R98.2 U4.4 U27.11
A_SDA: PB-NW.4 R100.2 U4.6
A_SDA': R97.2 U4.3 U27.1
AB_SCL: R93.2 U25.4 ZED.113
AB_SCL': R96.2 U25.5 U27.9 U27.10 U30.5
AB_SDA: R92.2 U25.3 ZED.114
AB_SDA': R95.2 U25.6 U27.2 U27.4 U30.6
B_!RST: PB-SE.1 U9.19
B_BUS_EN: U9.7 U27.5 U27.6
B_SCL: PB-SE.2 R106.2 U5.5
B_SCL': R103.2 U5.4 U27.8
B_SDA: PB-SE.4 R105.2 U5.6
B_SDA': R102.2 U5.3 U27.3
BANK13_00_N [LVDS]: BETA.89 ZED.89
BANK13_00_P [LVDS]: BETA.87 ZED.87
BANK13_01_N [LVDS]: BETA.90 ZED.90
BANK13_01_P [LVDS]: BETA.88 ZED.88
BANK13_02_N [LVDS]: BETA.93 ZED.93
BANK13_02_P [LVDS]: BETA.91 ZED.91
BANK13_03_N [LVDS]: BETA.94 ZED.94
BANK13_03_P [LVDS]: BETA.92 ZED.92
BANK13_04_N [LVDS]: BETA.195 ZED.195
BANK13_04_P [LVDS]: BETA.193 ZED.193
BANK13_05_N: BETA.196 ZED.196
BANK13_05_P: BETA.194 ZED.194
BANK13_06_N [LVDS]: BETA.199 ZED.199
BANK13_06_P [LVDS]: BETA.197 ZED.197
BANK13_SE_0: BETA.200 ZED.200
BETA_5V: C4.1 C8.1 R70.1 R110.1 U3.4 U3.5 U22.3 X1.4 X1.4A
BETA_5V': C15.1 C18.1 C21.1 C24.1 C27.1 C30.1 C33.1 C36.1 C39.1 C42.1 C45.1 C48.1 C51.1 C54.1 C57.1 C60.1 C63.1 C66.1 C69.1 C72.1 C75.1 C78.1 C81.1 C83.1 CNW.1 CSE.1 EE.1 EE.2 IOE.1 IOE.2 IOW.1 IOW.2 MCN.1 MCN.2 MCS.1 MCS.2 MXN.1 MXN.2 MXS.1 MXS.2 NE.1 NE.2 NN.1 NN.2 NW.1 NW.2 R70.2 RFE.1 RFE.2 RFW.1 RFW.2 SE.1 SE.2 SS.1 SS.2 SW.1 SW.2 U10.5 U11.5 U12.5 U13.5 U22.4 U26.5 U26.6 U26.7 U26.8 U26.9 VIO.1 VIO.2 WW.1 WW.2
BETA_5V_EN: R116.2 U1.8 U3.1
BETA_5V_PG: U1.1 U3.7
BETA_TCK: BETA.1
BETA_TDI: BETA.4
BETA_TDO: BETA.3
BETA_TMS: BETA.2
BTN: C94.1 R126.2 X2.1
BTN_A: C94.2 U1.6
BTN_S: R126.1 U1.7
CD: SD1.CD1 SD1.CD2 U28.1
CD': R109.2 U9.20 U28.16
CLK: SD1.5 U28.6
CMD: R122.2 SD1.3 U28.5
CNW_EN: CNW.3 U8.22
CNW_PG: C76.1 CNW.4 U8.21
CSE_EN: CSE.3 U9.22
CSE_PG: C79.1 CSE.4 U9.21
CSO_N_V': L12.2 R67.1 U14.1
CSO_NE_V: BETA.7 R67.2 U14.2
CSO_NW_V: C77.1 CNW.5 PWR-NW.6
CSO_S_V': L10.2 R71.1 U15.1
CSO_SE_V: C80.1 CSE.5 PWR-SE.6
CSO_SW_V: BETA.112 R71.2 U15.2
CTRL: X1.3 X1.3A
DAT0: R123.2 SD1.7 U28.7
DAT1: R124.2 SD1.8 U28.8
DAT2: R125.2 SD1.1 U28.3
DAT3: SD1.2 U28.4
DXP_0_N: ZED.100
DXP_0_P: ZED.98
E_I2C_EN: U9.5 U12.3
E_I2C_V: C31.1 PWR-NE.6 U12.1
E_SPI_EN: U9.2 U12.4
E_SPI_V: C32.1 PWR-NE.8 U12.6
E_VE: PWR-SE.4 R57.2 U19.2
E_VE': L5.2 R57.1 U19.1
E_VE_CV: PB-SE.20
E_VE_OV: PB-SE.9
E_VE_UV: PB-SE.11
EE_EN: EE.3 U6.7
EE_PG: EE.5 U6.6
FAN: Q1.3 X2.3
FAN_PWM: R118.2 U1.4
GND: BETA.15 BETA.16 BETA.21 BETA.22 BETA.27 BETA.28 BETA.33 BETA.34 BETA.39 BETA.40 BETA.45 BETA.46 BETA.51 BETA.52 BETA.65 BETA.66 BETA.71 BETA.72 BETA.77 BETA.85 BETA.86 BETA.95 BETA.96 BETA.115 BETA.116 BETA.121 BETA.122 BETA.127 BETA.128 BETA.133 BETA.134 BETA.139 BETA.140 BETA.145 BETA.146 BETA.151 BETA.152 BETA.165 BETA.166 BETA.171 BETA.172 BETA.177 BETA.185 BETA.186 BETA.191 BETA.192 C1.2 C2.2 C3.2 C4.2 C5.2 C6.2 C7.2 C8.2 C9.2 C10.2 C11.2 C12.2 C13.2 C14.2 C15.2 C16.2 C17.2 C18.2 C19.2 C20.2 C21.2 C22.2 C23.2 C24.2 C25.2 C26.2 C27.2 C28.2 C29.2 C30.2 C31.2 C32.2 C33.2 C34.2 C35.2 C36.2 C37.2 C38.2 C39.2 C40.2 C41.2 C42.2 C43.2 C44.2 C45.2 C46.2 C47.2 C48.2 C49.2 C50.2 C51.2 C52.2 C53.2 C54.2 C55.2 C56.2 C57.2 C58.2 C59.2 C60.2 C61.2 C62.2 C63.2 C64.2 C65.2 C66.2 C67.2 C68.2 C69.2 C70.2 C71.2 C72.2 C73.2 C74.2 C75.2 C76.2 C77.2 C78.2 C79.2 C80.2 C81.2 C82.2 C83.2 C84.2 C85.2 C86.2 C87.2 C88.2 C89.2 C90.2 C91.2 C92.2 C93.2 CNW.2 CSE.2 EE.4 EE.9 IOE.4 IOE.9 IOW.4 IOW.9 MCN.4 MCN.9 MCS.4 MCS.9 MXN.4 MXN.9 MXS.4 MXS.9 NE.4 NE.9 NN.4 NN.9 NW.4 NW.9 PB-NW.6 PB-SE.6 PWR-NE.2 PWR-NE.4 PWR-NW.1 PWR-NW.3 PWR-SE.1 PWR-SE.3 PWR-SW.2 PWR-SW.4 Q1.2 R3.2 R4.2 R7.2 R8.2 R11.2 R12.2 R15.2 R16.2 R19.2 R20.2 R23.2 R24.2 R27.2 R28.2 R31.2 R32.2 R34.2 R36.2 R38.2 R40.2 R42.2 R44.2 R46.2 R48.2 R50.2 R73.2 R74.2 R75.2 R76.2 R77.2 R78.2 R79.2 R80.2 R81.2 R82.2 R83.2 R85.2 R87.2 R89.2 R91.2 R111.2 R113.2 R115.2 RFE.4 RFE.9 RFW.4 RFW.9 S/N.1 SD1.6 SD1.MT1 SD1.MT2 SE.4 SE.9 SS.4 SS.9 SW.4 SW.9 U1.13 U1.EP U2.3 U2.EPAD U3.3 U3.EPAD U4.1 U5.1 U6.23 U6.25 U7.23 U7.25 U8.23 U8.25 U9.23 U9.25 U10.2 U11.2 U12.2 U13.2 U14.5 U14.EPAD U15.5 U15.EPAD U16.5 U16.EPAD U17.5 U17.EPAD U18.5 U18.EPAD U19.5 U19.EPAD U20.5 U20.EPAD U21.5 U21.EPAD U22.5 U22.EPAD U23.5 U23.EPAD U24.5 U24.EPAD U25.1 U26.10 U27.7 U28.17 U29.4 U30.1 U31.3 VIO.4 VIO.9 WW.4 WW.9 X1.1 X1.1A X1.5 X1.5A X2.4 ZED.15 ZED.16 ZED.21 ZED.22 ZED.27 ZED.28 ZED.33 ZED.34 ZED.39 ZED.40 ZED.45 ZED.46 ZED.51 ZED.52 ZED.65 ZED.66 ZED.71 ZED.72 ZED.77 ZED.85 ZED.86 ZED.95 ZED.96 ZED.115 ZED.116 ZED.121 ZED.122 ZED.127 ZED.128 ZED.133 ZED.134 ZED.139 ZED.140 ZED.145 ZED.146 ZED.151 ZED.152 ZED.165 ZED.166 ZED.171 ZED.172 ZED.177 ZED.185 ZED.186 ZED.191 ZED.192
IOE_EN: IOE.3 U9.16
IOE_PG: IOE.5 U9.15
IOE_V: PWR-SE.5 R66.2 R104.1 R105.1 R106.1 U21.4
IOE_V': L15.2 R66.1 U21.3
IOW_EN: IOW.3 U8.16
IOW_PG: IOW.5 U8.15
IOW_V: PWR-NW.5 R64.2 R99.1 R100.1 R101.1 U16.4
IOW_V': L17.2 R64.1 U16.3
JTAG_EN: U8.2 U10.4
JTAG_V: C26.1 PWR-SW.8 U10.6
JX1_00_N [LVDS]: BETA.13 ZED.13
JX1_00_P [LVDS]: BETA.11 ZED.11
JX1_01_N [LVDS]: BETA.14 ZED.14
JX1_01_P [LVDS]: BETA.12 ZED.12
JX1_02_N [LVDS]: BETA.19 ZED.19
JX1_02_P [LVDS]: BETA.17 ZED.17
JX1_03_N [LVDS]: BETA.20 ZED.20
JX1_03_P [LVDS]: BETA.18 ZED.18
JX1_04_N [LVDS]: BETA.25 ZED.25
JX1_04_P [LVDS]: BETA.23 ZED.23
JX1_05_N: BETA.26 ZED.26
JX1_05_P: BETA.24 ZED.24
JX1_06_N [LVDS]: BETA.31 ZED.31
JX1_06_P [LVDS]: BETA.29 ZED.29
JX1_07_N [LVDS]: BETA.32 ZED.32
JX1_07_P [LVDS]: BETA.30 ZED.30
JX1_08_N: BETA.37 ZED.37
JX1_08_P: BETA.35 ZED.35
JX1_09_N [LVDS]: BETA.38 ZED.38
JX1_09_P [LVDS]: BETA.36 ZED.36
JX1_10_N [LVDS]: BETA.43 ZED.43
JX1_10_P [LVDS]: BETA.41 ZED.41
JX1_11_N [LVDS]: BETA.44 ZED.44
JX1_11_P [LVDS]: BETA.42 ZED.42
JX1_12_N [LVDS]: BETA.49 ZED.49
JX1_12_P [LVDS]: BETA.47 ZED.47
JX1_13_N [LVDS]: BETA.50 ZED.50
JX1_13_P [LVDS]: BETA.48 ZED.48
JX1_14_N [LVDS]: BETA.55 ZED.55
JX1_14_P [LVDS]: BETA.53 ZED.53
JX1_15_N: BETA.56 ZED.56
JX1_15_P: BETA.54 ZED.54
JX1_16_N [LVDS]: BETA.63 ZED.63
JX1_16_P [LVDS]: BETA.61 ZED.61
JX1_17_N [LVDS]: BETA.64 ZED.64
JX1_17_P [LVDS]: BETA.62 ZED.62
JX1_18_N [LVDS]: BETA.69 ZED.69
JX1_18_P [LVDS]: BETA.67 ZED.67
JX1_19_N [LVDS]: BETA.70 ZED.70
JX1_19_P [LVDS]: BETA.68 ZED.68
JX1_20_N: BETA.75 ZED.75
JX1_20_P: BETA.73 ZED.73
JX1_21_N: BETA.76 ZED.76
JX1_21_P: BETA.74 ZED.74
JX1_22_N: BETA.83 ZED.83
JX1_22_P: BETA.81 ZED.81
JX1_23_N [LVDS]: BETA.84 ZED.84
JX1_23_P [LVDS]: BETA.82 ZED.82
JX2_00_N [LVDS]: BETA.119 ZED.119
JX2_00_P [LVDS]: BETA.117 ZED.117
JX2_01_N [LVDS]: BETA.120 ZED.120
JX2_01_P [LVDS]: BETA.118 ZED.118
JX2_02_N [LVDS]: BETA.125 ZED.125
JX2_02_P [LVDS]: BETA.123 ZED.123
JX2_03_N [LVDS]: BETA.126 ZED.126
JX2_03_P [LVDS]: BETA.124 ZED.124
JX2_04_N [LVDS]: BETA.131 ZED.131
JX2_04_P [LVDS]: BETA.129 ZED.129
JX2_05_N [LVDS]: BETA.132 ZED.132
JX2_05_P [LVDS]: BETA.130 ZED.130
JX2_06_N [LVDS]: BETA.137 ZED.137
JX2_06_P [LVDS]: BETA.135 ZED.135
JX2_07_N [LVDS]: BETA.138 ZED.138
JX2_07_P [LVDS]: BETA.136 ZED.136
JX2_08_N [LVDS]: BETA.143 ZED.143
JX2_08_P [LVDS]: BETA.141 ZED.141
JX2_09_N [LVDS]: BETA.144 ZED.144
JX2_09_P [LVDS]: BETA.142 ZED.142
JX2_10_N [LVDS]: BETA.149 ZED.149
JX2_10_P [LVDS]: BETA.147 ZED.147
JX2_11_N [LVDS]: BETA.150 ZED.150
JX2_11_P [LVDS]: BETA.148 ZED.148
JX2_12_N [LVDS]: BETA.155 ZED.155
JX2_12_P [LVDS]: BETA.153 ZED.153
JX2_13_N [LVDS]: BETA.156 ZED.156
JX2_13_P [LVDS]: BETA.154 ZED.154
JX2_14_N: BETA.163 ZED.163
JX2_14_P: BETA.161 ZED.161
JX2_15_N [LVDS]: BETA.164 ZED.164
JX2_15_P [LVDS]: BETA.162 ZED.162
JX2_16_N [LVDS]: BETA.169 ZED.169
JX2_16_P [LVDS]: BETA.167 ZED.167
JX2_17_N [LVDS]: BETA.170 ZED.170
JX2_17_P [LVDS]: BETA.168 ZED.168
JX2_18_N [LVDS]: BETA.175 ZED.175
JX2_18_P [LVDS]: BETA.173 ZED.173
JX2_19_N [LVDS]: BETA.176 ZED.176
JX2_19_P [LVDS]: BETA.174 ZED.174
JX2_20_N [LVDS]: BETA.183 ZED.183
JX2_20_P [LVDS]: BETA.181 ZED.181
JX2_21_N [LVDS]: BETA.184 ZED.184
JX2_21_P [LVDS]: BETA.182 ZED.182
JX2_22_N: BETA.189 ZED.189
JX2_22_P: BETA.187 ZED.187
JX2_23_N [LVDS]: BETA.190 ZED.190
JX2_23_P [LVDS]: BETA.188 ZED.188
MCN_EN: MCN.3 U7.18
MCN_PG: MCN.5 U7.17
MCS_EN: MCS.3 U7.22
MCS_PG: MCS.5 U7.21
MXN_EN: MXN.3 U7.16
MXN_PG: MXN.5 U7.15
MXS_EN: MXS.3 U7.1
MXS_PG: MXS.5 U7.24
N$1: C49.1 L9.1 MXS.8 R41.1
N$2: C5.1 U2.8
N$3: C91.1 C92.1 FB1.2 R122.1 R123.1 R124.1 R125.1 SD1.4
N$7: C90.1 R119.2 U30.7 U30.8
N$8: C6.1 U3.8
N$10: R73.1 U18.6
N$14: Q1.1 R118.1
N$15: R110.2 R111.1 U3.6
N$19: R114.2 R115.1 U2.6
N$32: C11.1 R99.2 U4.7 U4.8
N$33: C12.1 R104.2 U5.7 U5.8
N$34: C13.1 L1.1 R1.2 R2.1 WW.8
N$38: R75.1 U24.6
N$39: R2.2 R4.1 TR1.2 WW.7
N$41: R3.1 TR1.1
N$46: MXS.7 R41.2 R42.1
N$47: C50.1 MXS.6
N$48: C64.1 L14.1 R47.1 RFE.8
N$49: R47.2 R48.1 RFE.7
N$76: R78.1 U23.6
N$88: C14.1 WW.6
N$97: C65.1 RFE.6
N$98: C67.1 IOE.8 L15.1 R49.1
N$106: ZED.5
N$107: ZED.109
N$230: ZED.110
N$231: ZED.111
N$244: R84.2 R85.1 U9.11
N$248: ZED.6
N$249: ZED.8
N$250: R86.2 R87.1 U8.11
N$253: R1.1 TR1.3
N$416: C16.1 L2.1 NW.8 R5.2 R6.1
N$417: NW.7 R6.2 R8.1 TR2.2
N$418: R7.1 TR2.1
N$419: C17.1 NW.6
N$420: IOE.7 R49.2 R50.1
N$421: C68.1 IOE.6
N$423: R74.1 U20.6
N$608: C19.1 L3.1 NN.8 R9.2 R10.1
N$609: NN.7 R10.2 R12.1 TR3.2
N$610: R5.1 TR2.3
N$611: C20.1 NN.6
N$612: C70.1 L16.1 R43.1 RFW.8
N$613: R43.2 R44.1 RFW.7
N$615: R76.1 U19.6
N$800: C22.1 L4.1 NE.8 R13.2 R14.1
N$801: NE.7 R14.2 R16.1 TR4.2
N$802: R11.1 TR3.1
N$803: C23.1 NE.6
N$804: C71.1 RFW.6
N$805: C73.1 IOW.8 L17.1 R45.1
N$807: R77.1 U17.6
N$992: C37.1 EE.8 L5.1 R17.2 R18.1
N$993: EE.7 R18.2 R20.1 TR5.2
N$994: R9.1 TR3.3
N$995: C38.1 EE.6
N$996: IOW.7 R45.2 R46.1
N$997: C74.1 IOW.6
N$998: R15.1 TR4.1
N$999: R79.1 U16.6
N$1000: C40.1 L6.1 R21.2 R22.1 SE.8
N$1001: R22.2 R24.1 SE.7 TR6.2
N$1002: R13.1 TR4.3
N$1003: C41.1 SE.6
N$1006: C82.1 R94.2 U25.7 U25.8
N$1007: R19.1 TR5.1
N$1008: C43.1 L7.1 R25.2 R26.1 SS.8
N$1009: R26.2 R28.1 SS.7 TR7.2
N$1010: R17.1 TR5.3
N$1011: C44.1 SS.6
N$1014: R23.1 TR6.1
N$1015: R80.1 U21.6
N$1016: C46.1 L8.1 R29.2 R30.1 SW.8
N$1017: R30.2 R32.1 SW.7 TR8.2
N$1018: R21.1 TR6.3
N$1019: C47.1 SW.6
N$1022: R27.1 TR7.1
N$1023: R81.1 U14.6
N$1944: R25.1 TR7.3
N$1945: R83.1 U15.6
N$3234: C52.1 L10.1 MCS.8 R39.1
N$3235: MCS.7 R39.2 R40.1
N$3236: C53.1 MCS.6
N$3239: R31.1 TR8.1
N$3240: R82.1 U22.6
N$3425: C55.1 L11.1 R37.1 VIO.8
N$3426: R37.2 R38.1 VIO.7
N$3427: C56.1 VIO.6
N$3430: R29.1 TR8.3
N$3616: C58.1 L12.1 MCN.8 R35.1
N$3617: MCN.7 R35.2 R36.1
N$3618: C59.1 MCN.6
N$3807: C61.1 L13.1 MXN.8 R33.1
N$3808: MXN.7 R33.2 R34.1
N$3809: C62.1 MXN.6
N$4020: R88.2 R89.1 U6.11
N$4041: R90.2 R91.1 U7.11
N_CHK_V: PB-NW.13
N_I2C_EN: U9.3 U13.4
N_I2C_V: C35.1 PWR-NE.7 U13.6
N_SPI_EN: U9.4 U13.3
N_SPI_V: C34.1 PWR-NE.5 U13.1
N_VE: PWR-NE.3 R54.2 U20.4
N_VE': L4.2 R54.1 U20.3
N_VE_CV: PB-NW.18
N_VE_OV: PB-NW.7
N_VE_RS: PB-NW.8
N_VE_UV: PB-NW.19
N_VN: PWR-NE.1 R53.2 U20.2
N_VN': L3.2 R53.1 U20.1
N_VN_CV: PB-NW.16
N_VN_OV: PB-NW.5
N_VN_RS: PB-NW.12
N_VN_UV: PB-NW.17
N_VW: PWR-NW.2 R52.2 U18.4
N_VW': L2.2 R52.1 U18.3
N_VW_CV: PB-NW.14
N_VW_OV: PB-NW.3
N_VW_RS: PB-NW.10
N_VW_UV: PB-NW.15
NC$1 [LVDS]: BETA.113
NC$2 [LVDS]: BETA.114
NE_EN: NE.3 U6.16
NE_PG: NE.5 U6.15
NN_EN: NN.3 U6.18
NN_PG: NN.5 U6.17
NW_EN: NW.3 U6.20
NW_PG: NW.5 U6.19
PCIE_I2C_V: BETA.198
PCIE_N_5V: BETA.59 BETA.60
PCIE_N_V: BETA.79 BETA.80 R68.2 U14.4
PCIE_N_V': L13.2 R68.1 U14.3
PCIE_N_VCCIO: BETA.78
PCIE_S_5V: BETA.159 BETA.160
PCIE_S_V: BETA.179 BETA.180 R72.2 U15.4
PCIE_S_V': L9.2 R72.1 U15.3
PCIE_S_VCCIO: BETA.178
PCIE_VCCIO: R61.2 U23.2
PEX_N_V: BETA.57 BETA.58
PEX_S_V: BETA.157 BETA.158
PMOD_D0: U28.9 ZED.101
PMOD_D1: U28.10 ZED.102
PMOD_D2: U28.12 ZED.103
PMOD_D3: U28.11 ZED.104
PMOD_D6: U28.14 ZED.107
PMOD_D7: U28.13 ZED.108
PMOD_SCL: R107.2 U6.9 U7.9 U8.9 U9.9 U14.9 U15.9 U16.9 U17.9 U18.9 U19.9 U20.9 U21.9 U22.9 U23.9 U24.9 U29.2 ZED.105
PMOD_SDA: R108.2 U6.10 U7.10 U8.10 U9.10 U14.8 U15.8 U16.8 U17.8 U18.8 U19.8 U20.8 U21.8 U22.8 U23.8 U24.8 U29.1 ZED.106
REGOUT: C84.1 L18.1 U26.4 U26.11 U26.12 U26.13
RFAB_E_V: PWR-SE.8
RFAB_W_V: PWR-NW.8
RFE_EN: RFE.3 U9.18
RFE_PG: RFE.5 U9.17
RFE_V: PWR-SE.7 R65.2 U21.2
RFE_V': L14.2 R65.1 U21.1
RFW_EN: RFW.3 U8.18
RFW_PG: RFW.5 U8.17
RFW_V: PWR-NW.7 R63.2 U16.2
RFW_V': L16.2 R63.1 U16.1
S_CHK_V: PB-SE.13
S_I2C_EN: U8.3 U11.4
S_I2C_V: C29.1 PWR-SW.7 U11.6
S_SPI_EN: U8.4 U11.3
S_SPI_V: C28.1 PWR-SW.5 U11.1
S_VE: PWR-SE.2 R58.2 U19.4
S_VE': L6.2 R58.1 U19.3
S_VE_CV: PB-SE.14
S_VE_OV: PB-SE.3
S_VE_RS: PB-SE.10
S_VE_UV: PB-SE.15
S_VS: PWR-SW.1 R59.2 U17.2
S_VS': L7.2 R59.1 U17.1
S_VS_CV: PB-SE.16
S_VS_OV: PB-SE.5
S_VS_RS: PB-SE.12
S_VS_UV: PB-SE.17
S_VW: PWR-SW.3 R60.2 U17.4
S_VW': L8.2 R60.1 U17.3
S_VW_CV: PB-SE.18
S_VW_OV: PB-SE.7
S_VW_RS: PB-SE.8
S_VW_UV: PB-SE.19
SE_0: BETA.9 ZED.9
SE_1: BETA.10 ZED.10
SE_EN: SE.3 U6.5
SE_PG: SE.5 U6.4
SN_SENSE: S/N.2 U1.10
SS_EN: SS.3 U6.3
SS_PG: SS.5 U6.2
SW_EN: SW.3 U6.1
SW_PG: SW.5 U6.24
VBAT: ZED.7
VCC: C85.1 C86.1 C87.1 C88.1 C89.1 FB1.1 L18.2 R84.1 R86.1 R88.1 R90.1 R94.1 R95.1 R96.1 R97.1 R98.1 R102.1 R103.1 R107.1 R108.1 R109.1 R116.1 R117.1 R119.1 U4.2 U5.2 U6.8 U6.12 U7.8 U7.12 U8.8 U8.12 U9.8 U9.12 U14.10 U15.10 U16.10 U17.10 U18.10 U19.10 U20.10 U21.10 U22.10 U23.10 U24.10 U27.14 U29.5 U29.6 U29.7 U29.8
VCCIO: L11.2 R55.1 R56.1 R61.1 R62.1 R92.1 R93.1 U23.1 U23.3 U24.1 U24.3 U25.2
VCCO_13 [LVDS]: R56.2 U24.4 ZED.198
VCCO_34: R62.2 U23.4 ZED.78 ZED.79 ZED.80
VCCO_35: R55.2 U24.2 ZED.178 ZED.179 ZED.180
VIN: C1.1 C3.1 C7.1 C9.1 R112.1 U2.2 U3.2 U31.1 X2.2
VIN_SENSE: R112.2 R113.1 U1.9
VIO_EN: U7.20 VIO.3
VIO_PG: U7.19 VIO.5
VP_0_N: VP-.TP ZED.99
VP_0_P: VP+.TP ZED.97
VSB: C93.1 R120.1 R121.1 R127.1 U1.16 U30.2 U31.6
W_I2C_EN: U8.5 U10.3
W_I2C_V: C25.1 PWR-SW.6 U10.1
W_VW: PWR-NW.4 R51.2 U18.2
W_VW': L1.2 R51.1 U18.1
W_VW_CV: PB-NW.20
W_VW_OV: PB-NW.9
W_VW_UV: PB-NW.11
WW_EN: U6.22 WW.3
WW_PG: U6.21 WW.5
X_SCL: R120.2 U1.11 U30.4
X_SDA: R121.2 U1.12 U30.3
ZED_5V: C2.1 C10.1 R69.1 R114.1 U2.4 U2.5 U22.1 X1.2 X1.2A
ZED_5V': R69.2 U22.2 ZED.57 ZED.58 ZED.59 ZED.60 ZED.112 ZED.157 ZED.158 ZED.159 ZED.160
ZED_5V_EN: R117.2 U1.5 U2.1
ZED_5V_PG: U1.2 U2.7
ZED_TCK: ZED.1
ZED_TDI: ZED.4
ZED_TDO: ZED.3
ZED_TMS: ZED.2

## Tracks (layer width: path | path; a pad name or v marks a point on that pad's centre or on a via)
!X_MCLR  (via drill 0.2)
  Top 0.203: U1.3 v93.03,36.84 | U9.24 84.84,35.54 arc90 85.09,35.79 v85.09,36.2
  Route2 0.203: v85.09,36.2 86.57,34.72 arc45 86.83,34.61 88.42,34.61 arc45 88.69,34.72 90.7,36.73 arc-45 90.97,36.84 v93.03,36.84
  Bottom 0.203: R127.2 v93.03,36.83 v93.03,36.84
A_!RST  (via drill 0.2)
  Top 0.203: PB-NW.1 20.7,44.8 arc90 20.45,44.54 20.45,37.11 arc-45 20.33,36.84 v19.37,35.88 | v17.65,29.84 17.65,24.11 U8.19
  Route15 0.203: v19.37,35.88 18.6,35.11 arc45 18.41,34.66 18.41,30.87 arc-45 18.23,30.42 v17.65,29.84
A_BUS_EN  (via drill 0.2, 0.25)
  Top 0.203: U9.6 80.66,36.89 arc90 80.41,37.15 v78.74,37.15
  Route2 0.203: v78.74,37.15 78.04,37.15 arc90 77.66,36.77 77.66,34.77 arc-45 77.55,34.5 76.38,33.32 arc-45 76.11,33.21 71.98,33.21 arc45 71.71,33.1 v70.48,31.87
  Bottom 0.203: 69.51,31.14 69.51,30.75 arc-90 69.25,30.49 U27.12 | U27.13 69.51,31.14 | v70.48,31.87 69.87,31.26 arc-45 69.6,31.14 69.51,31.14
A_SCL  (via drill 0.2)
  Top 0.203: PB-NW.2 23.56,44.8 arc90 23.18,44.41 v23.18,40.64 | U4.5 24.69,35.1 arc45 24.76,35.28 24.76,36.41 arc45 24.69,36.59 v24.45,36.83
  Bottom 0.203: v23.18,40.64 24.13,40.64 arc-90 24.51,40.26 24.51,40.04 arc-45 24.4,39.77 24.37,39.74 arc45 24.26,39.47 24.26,37.13 arc45 24.33,36.95 v24.45,36.83 R101.2
A_SCL'  (via drill 0.2)
  Top 0.203: U4.4 24.37,33.73 arc-45 24.45,33.55 v24.45,32.06
  Bottom 0.203: R98.2 v24.45,32.06 24.37,31.99 arc45 24.29,31.81 24.29,29.2 arc45 24.41,28.93 25.16,28.18 arc45 25.43,28.07 43.15,28.07 arc45 43.42,28.18 47.77,32.53 arc-45 48.04,32.64 61.77,32.64 arc-45 62.12,32.49 64.66,29.96 arc45 64.93,29.84 U27.11
A_SDA  (via drill 0.2)
  Top 0.203: PB-NW.4 24.07,44.3 arc90 23.81,44.04 v23.81,40 | U4.6 24.18,35.3 arc45 24.26,35.48 24.26,35.96 arc45 24.18,36.14 v23.49,36.83
  Bottom 0.203: 23.49,36.13 R100.2 v23.49,36.83 23.74,37.07 arc45 23.81,37.25 v23.81,40
A_SDA'  (via drill 0.2)
  Top 0.203: U4.3 23.19,33.59 arc45 23.11,33.41 23.11,32.55 arc45 23.19,32.37 v23.49,32.07
  Route15 0.203: v72.71,31.87 72.71,31.71 arc-45 72.6,31.44 71.37,30.21 arc-45 71.1,30.1 v62.55,30.1
  Bottom 0.203: R97.2 v23.49,32.07 23.67,31.89 arc-45 23.74,31.71 23.74,28.99 arc45 23.86,28.72 24.91,27.67 arc45 25.18,27.56 43.4,27.56 arc45 43.67,27.67 48.02,32.02 arc-45 48.29,32.13 61.51,32.13 arc-45 61.87,31.98 62.44,31.42 arc-45 62.55,31.15 v62.55,30.1 | U27.1 v72.71,31.87
AB_SCL  (via drill 0.2)
  Top 0.203: U25.4 60.92,26.71 arc-45 60.96,26.62 v60.96,25.08
  Bottom 0.203: ZED.113 65.6,11.71 arc45 65.49,11.98 63.1,14.37 arc-45 62.99,14.64 62.99,22.47 arc45 62.81,22.92 61.15,24.58 arc-45 60.96,25.03 v60.96,25.08 60.96,26.61 arc90 60.58,26.99 R93.2
AB_SCL'  (via drill 0.2)
  Top 0.203: v61.72,28.57 61.72,28.15 arc-45 61.61,27.88 U25.5
  Route2 0.203: v70.48,27.81 70.48,28.19 arc-90 70.87,28.57 75.3,28.57 arc-45 75.75,28.39 v76.52,27.62
  Route15 0.203: v61.72,28.57 70.1,28.57 arc-90 70.48,28.19 v70.48,27.81 | v76.52,27.62 77.08,27.06 arc45 77.26,26.99 77.68,26.99 arc45 77.86,27.06 78.03,27.23 arc45 78.1,27.41 78.1,27.45 arc-45 78.18,27.63 79.7,29.15 arc-45 80.15,29.34 81.84,29.34 arc45 82.29,29.52 84.46,31.69 arc-45 84.91,31.88 v87.51,31.88
  Bottom 0.203: U27.10 69.33,29.2 arc-45 69.6,29.08 69.85,28.83 | U27.9 69.41,28.54 arc45 69.68,28.66 69.85,28.83 | 69.85,28.83 70.37,28.31 arc-45 70.48,28.04 v70.48,27.81 | R96.2 v61.72,28.57 | U30.5 88.22,31.95 arc-45 88.04,31.88 v87.51,31.88
AB_SDA  (via drill 0.2, 0.33)
  Top 0.203: U25.3 60.14,26.41 v60.14,25.08
  Route15 0.203: v65.6,2.54 65.6,10.12 arc45 65.49,10.39 v62.48,13.4
  Bottom 0.203: ZED.114 v65.6,2.54 | v62.48,13.4 62.48,22.28 arc45 62.3,22.73 60.28,24.75 arc-45 v60.14,25.08 R92.2
AB_SDA'  (via drill 0.2)
  Top 0.203: v61.09,29.84 61.09,28.22 arc-45 60.97,27.95 U25.6
  Route2 0.203: v71.75,31.87 71.75,31.5 arc90 72.14,31.11 74.14,31.11 arc-45 74.41,31 77.28,28.13 arc-45 77.47,27.68 v77.47,27.62
  Route15 0.203: v71.75,31.87 70.98,31.1 arc-45 70.72,30.99 70.21,30.99 arc-45 70.03,31.06 arc45 69.9,31.11 62.52,31.11 arc45 62.24,31 v61.09,29.84 | v77.47,27.62 79.51,29.66 arc-45 79.96,29.84 81.65,29.84 arc45 82.1,30.03 84.27,32.2 arc-45 84.72,32.38 v87,32.38
  Bottom 0.203: U27.2 72.73,31.14 | 72.73,31.14 72.73,30.1 arc90 72.99,29.84 U27.4 | v71.75,31.87 72.37,31.26 arc45 72.64,31.14 72.73,31.14 | R95.2 60.83,29.53 arc90 61.09,29.78 v61.09,29.84 | v87,32.38 87.84,32.38 arc45 88.02,32.46 U30.6
B_!RST
  Top 0.203: PB-SE.1 81.03,12.36 arc90 81.28,12.61 81.28,20.69 arc-45 81.47,21.14 83,22.67 arc45 83.19,23.12 83.19,29.25 arc-45 83.33,29.61 83.52,29.79 arc45 83.66,30.15 83.66,32.25 arc-45 83.74,32.43 83.79,32.48 arc45 83.86,32.66 U9.19
B_BUS_EN  (via drill 0.2, 0.25)
  Top 0.203: U9.7 78.49,35.54 arc90 78.1,35.16 78.1,34.45 arc-45 77.99,34.18 v75.69,31.88
  Route15 0.203: v75.69,31.88 75.34,31.88 arc45 75.07,31.77 71.87,28.56 arc45 71.75,28.29 v71.75,27.81
  Bottom 0.203: U27.5 72.91,29.2 arc45 72.64,29.08 72.39,28.83 | U27.6 72.83,28.54 arc-45 72.56,28.66 72.39,28.83 | 72.39,28.83 71.87,28.31 arc45 71.75,28.04 v71.75,27.81
B_SCL  (via drill 0.2)
  Top 0.203: PB-SE.2 78.04,12.36 arc90 78.42,12.74 v78.42,16.51 | U5.5 76.91,22.05 arc45 76.83,21.87 76.83,20.74 arc45 76.91,20.56 v77.15,20.32
  Bottom 0.203: v78.42,16.51 77.47,16.51 arc-90 77.09,16.89 77.09,17.11 arc-45 77.2,17.38 77.23,17.41 arc45 77.34,17.68 77.34,20.02 arc45 77.27,20.2 v77.15,20.32 R106.2
B_SCL'  (via drill 0.2)
  Top 0.203: U5.4 77.23,23.42 arc-45 77.15,23.6 v77.15,25.09
  Route15 0.203: v69.53,27.82 69.53,27.66 arc45 69.64,27.39 69.94,27.1 arc45 70.2,26.99 75.09,26.99 arc-45 75.36,26.88 v77.15,25.09
  Bottom 0.203: v77.15,25.09 R103.2 | U27.8 v69.53,27.82
B_SDA  (via drill 0.2)
  Top 0.203: PB-SE.4 77.53,12.85 arc90 77.79,13.11 v77.79,17.46 | U5.6 77.42,21.86 arc45 77.34,21.67 77.34,21.19 arc45 77.42,21.01 v78.1,20.32
  Bottom 0.203: v77.79,17.46 77.79,19.9 arc-45 77.86,20.08 v78.1,20.32 R105.2
B_SDA'  (via drill 0.2)
  Top 0.203: U5.3 78.41,23.56 arc45 78.49,23.74 78.49,24.6 arc45 78.41,24.78 v78.1,25.08
  Bottom 0.203: R102.2 v78.1,25.08 78.1,26.42 arc90 77.85,26.67 75.82,26.67 arc-90 75.56,26.92 75.56,30.24 arc90 75.31,30.49 U27.3
BANK13_00_N  (via drill 0.2)
  Top 0.152: BETA.89 v35.2,51.44
  Bottom 0.152: ZED.89 v35.2,51.44
BANK13_00_P  (via drill 0.2)
  Top 0.152: BETA.87 v36,51.44
  Bottom 0.152: ZED.87 v36,51.44
BANK13_01_N  (via drill 0.2)
  Top 0.152: BETA.90 v35.2,50.16
  Bottom 0.152: ZED.90 v35.2,50.16
BANK13_01_P  (via drill 0.2)
  Top 0.152: BETA.88 v36,50.16
  Bottom 0.152: ZED.88 v36,50.16
BANK13_02_N  (via drill 0.2)
  Top 0.152: BETA.93 v33.6,51.44
  Bottom 0.152: ZED.93 v33.6,51.44
BANK13_02_P  (via drill 0.2)
  Top 0.152: BETA.91 v34.4,51.44
  Bottom 0.152: ZED.91 v34.4,51.44
BANK13_03_N  (via drill 0.2)
  Top 0.152: BETA.94 v33.6,50.16
  Bottom 0.152: ZED.94 v33.6,50.16
BANK13_03_P  (via drill 0.2)
  Top 0.152: BETA.92 v34.4,50.16
  Bottom 0.152: ZED.92 v34.4,50.16
BANK13_04_N  (via drill 0.2)
  Top 0.152: BETA.195 v32.8,6.98
  Bottom 0.152: ZED.195 v32.8,6.98
BANK13_04_P  (via drill 0.2)
  Top 0.152: BETA.193 v33.6,6.98
  Bottom 0.152: ZED.193 v33.6,6.98
BANK13_05_N  (via drill 0.2)
  Top 0.152: BETA.196 v32.8,5.71
  Bottom 0.152: ZED.196 v32.8,5.71
BANK13_05_P  (via drill 0.2)
  Top 0.152: BETA.194 v33.6,5.71
  Bottom 0.152: ZED.194 v33.6,5.71
BANK13_06_N  (via drill 0.2)
  Top 0.152: BETA.199 v31.2,6.98
  Bottom 0.152: ZED.199 v31.2,6.98
BANK13_06_P  (via drill 0.2)
  Top 0.152: BETA.197 v32,6.98
  Bottom 0.152: ZED.197 v32,6.98
BANK13_SE_0  (via drill 0.2)
  Top 0.203: BETA.200 v31.2,5.71
  Bottom 0.203: ZED.200 v31.2,5.71
BETA_5V  (via drill 0.2, 0.25, 0.61)
  Top 0.152: 91.67,27.07 91.27,26.67 v90.81,26.67
  Top 0.203: R110.1 99.69,44.07 98.74,44.07
  Top 0.305: U3.4 96.1,44.84 | 98.2,44.84 U3.5 | 98.17,42.55 C8.1
  Top 0.508: 96.1,44.84 96.1,44.45 97.16,44.45 | 97.16,44.45 98.2,44.45 | 98.2,44.45 98.2,44.84 | 98.2,44.45 98.36,44.45 98.74,44.07 v98.74,42.86 v98.74,42.23 v97.79,42.23 97.6,42.23 97.6,44.13 | v97.79,44.13 97.6,44.13 | 97.6,44.13 97.47,44.13 97.16,44.45
  Top 0.813: X1.4A X1.4 93.34,27.07 v92.71,26.67 | 91.67,27.07 R70.1 | v97.79,44.13 98.04,44.13 98.17,44.01 98.17,42.55
  Top 1.016: R70.1 v92.71,26.67
  Route2 1.016: 100.33,41.72 100.33,29.85 arc-45 100.14,29.4 98.23,27.49 arc-45 97.78,27.3 93.61,27.3 arc45 93.16,27.12 v92.71,26.67 | 100.33,41.59 arc90 99.69,42.23 v98.74,42.23 v97.79,42.23 v97.79,44.13 C4.1 98.56,42.23